# Altium PCB Microcontroller PCB 404.PcbDoc
Units mil, origin at the board's own origin, x right, y up, seen from the top; angles counter-clockwise.
Board outline 1740 x 1785 mil, 2 copper layers (Top Layer, Bottom Layer); 22 components, 26 nets, 103 pads, 1 vias.
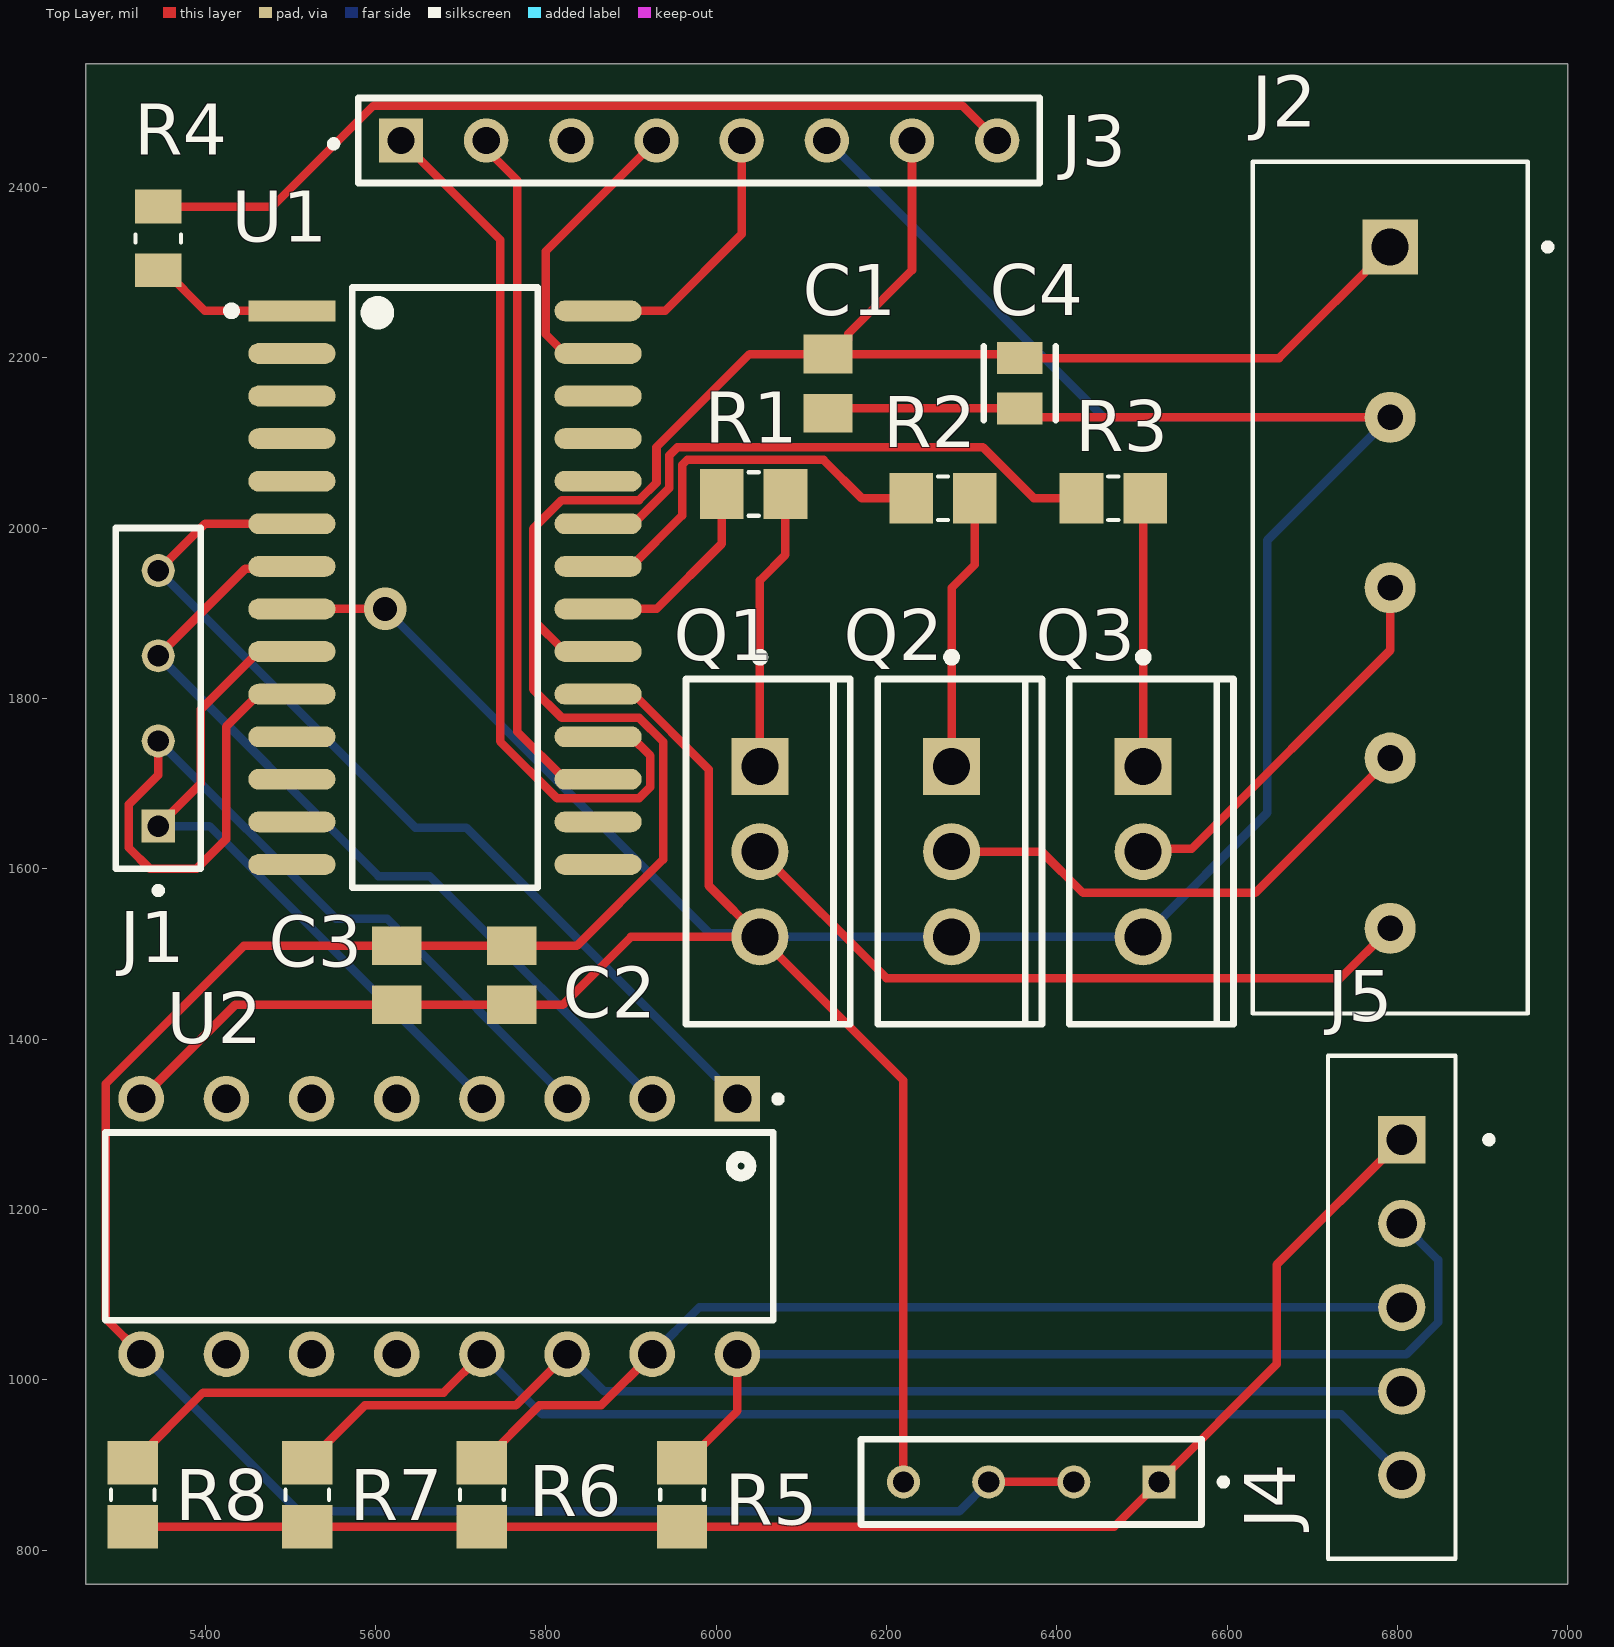
[diagram p0: Top Layer view]
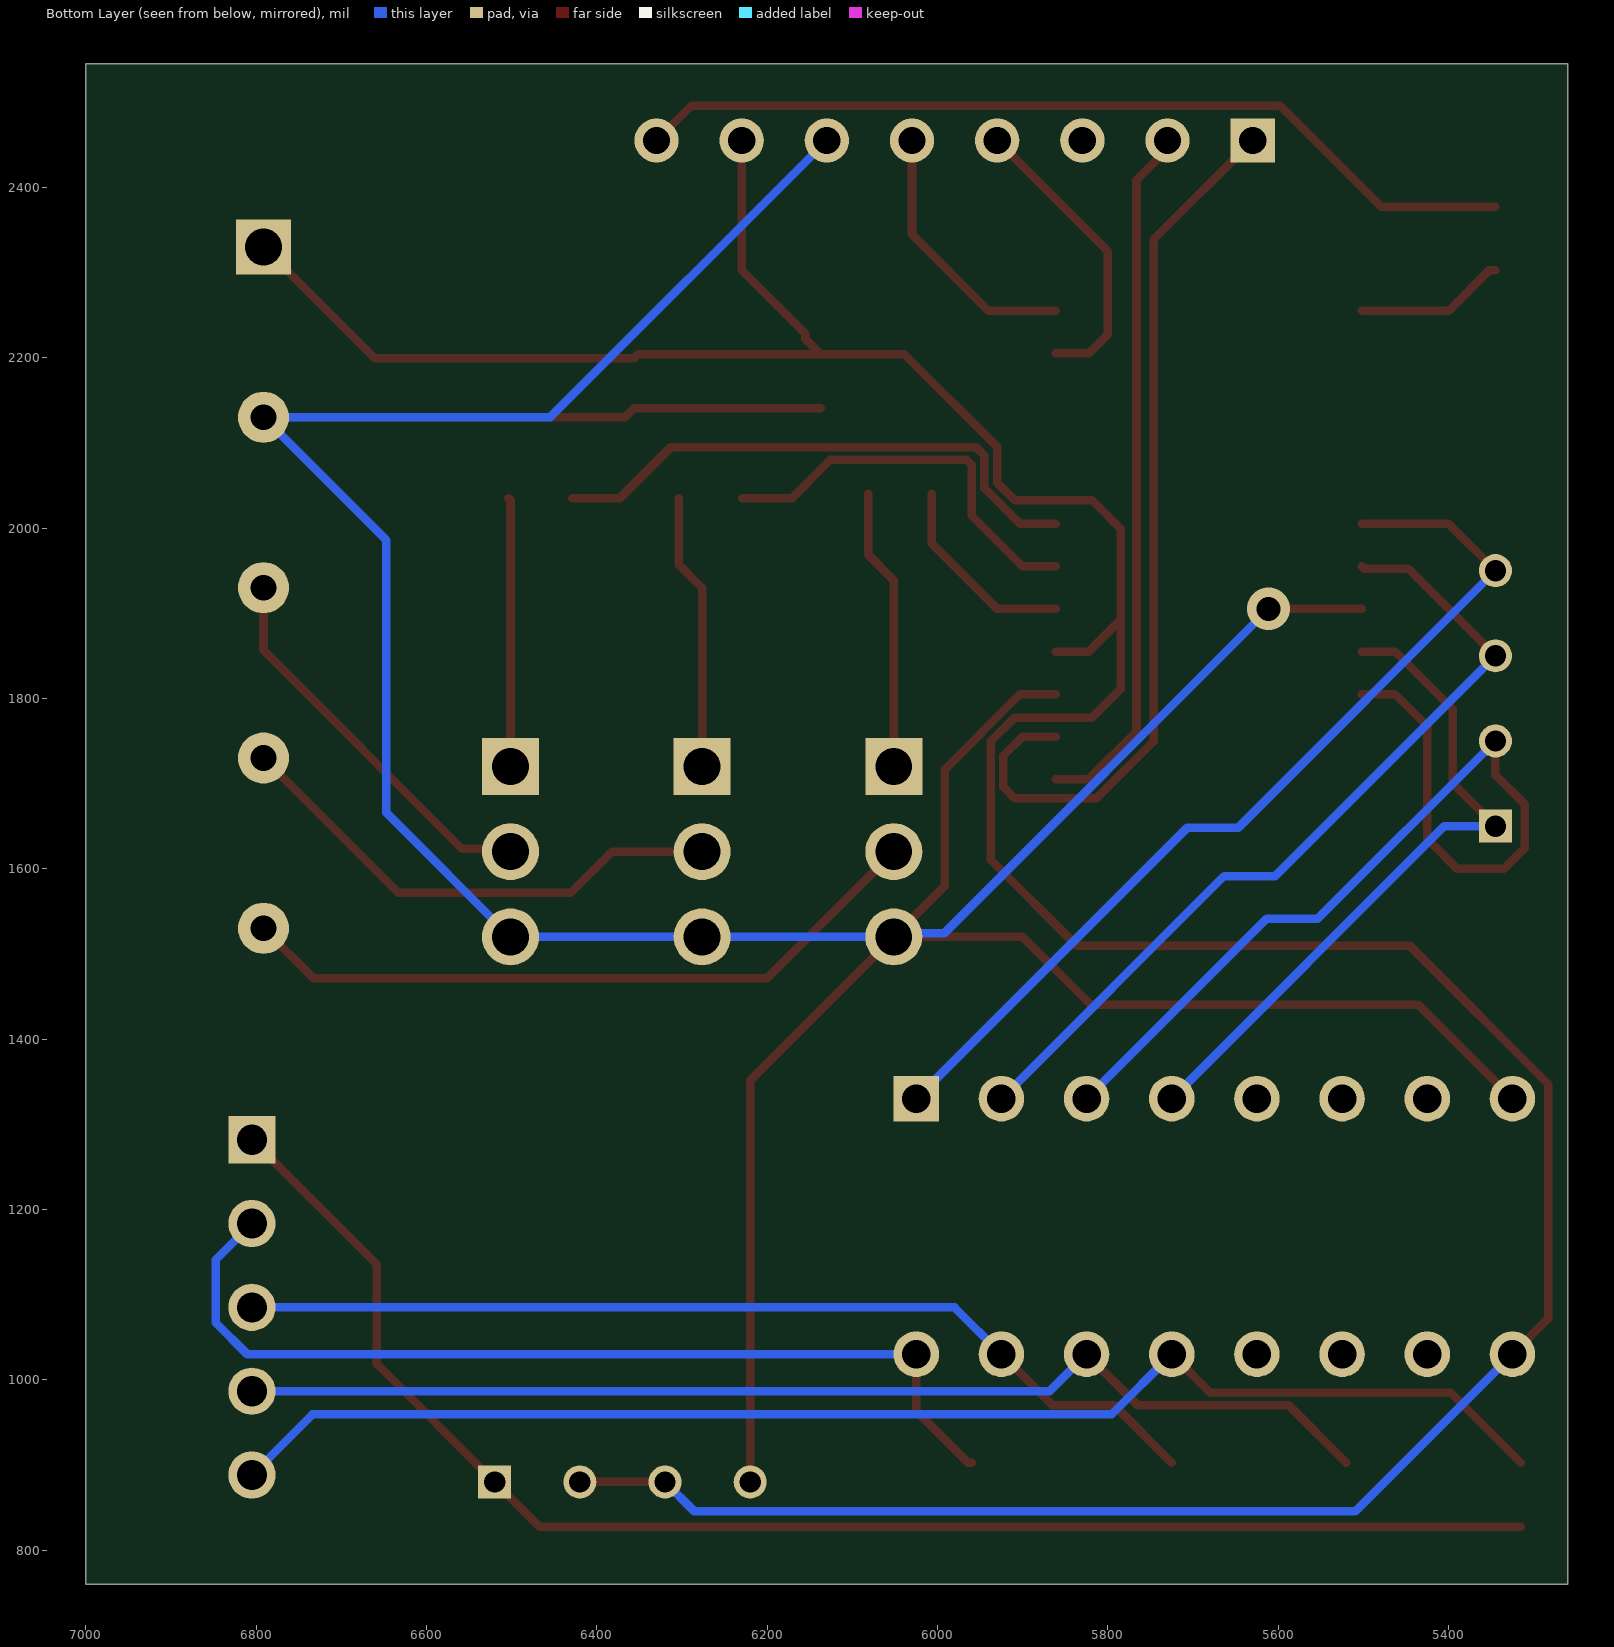
[diagram p1: Bottom Layer view, seen from below]

## Layer stack, top to bottom
Top Solder: solder mask 0.4, Solder Resist, Dk 3.5
Top Layer: signal copper 1.4
Dielectric 1: dielectric 12.6, FR-4, Dk 4.8
Bottom Layer: signal copper 1.4
Bottom Solder: solder mask 0.4, Solder Resist, Dk 3.5

## Board outline
5260,2545 7000,2545 7000,760 5260,760

## Design rules (kind name [scope] priority, off if disabled: settings)
Clearance [All] p1: gap=10 ignorepadtopadclearanceinfootprint=FALSE except(0: Arc-Hole Track-Hole SMDPad-Hole THPad-Hole Via-Hole Fill-Hole Poly-Hole Region-Hole Text-Hole; 5: Arc-Arc Arc-Track Arc-SMDPad Track-Track Track-SMDPad SMDPad-SMDPad)
PolygonConnect [All] p1: connectstyle=Relief reliefconductorwidth=10 reliefentries=4 polygonreliefangle="90 Angle" airgapwidth=10
RoutingVias [All] p1: holewidth=28 width=50 viastyle="Through Hole" minholewidth=28 minwidth=50 maxholewidth=28 maxwidth=50
SolderMaskExpansion [All] p1: expansion=4 istentingtop=FALSE
Width [All] p1: maxlimit=50 minlimit=10 preferedwidth=10 bottomlayer_maxwidth=10 minimp=50.000000 maximp=50.000000 favimp=50.000000
30 further rules are at their usual default settings.

## Components (designator, comment, footprint, x,y, rotation, side; value= is the part's Value field where it differs from the comment)
C1 "C0805C104K4RACTU" CAPC2012X100N 6131.42,2169.65 r270 top value="0.10 μF"
C2 "C0805C104K4RACTU" CAPC2012X100N 5760,1475 r270 top
C3 "C2012X7S0J106M085AC" CAPC2012X100N 5625,1475 r270 top
C4 "GRM21BR60J107ME15K" FP-C0805C-DN-MFG 6356.42,2170 r270 top
J1 "TS-104-T-A" SAMTEC_TS-104-T-A 5345,1800 r90 top
J2 "Comment" PCBComponent_1 6791.42,2330 r270 top
J3 "TS-108-X-A-1" SAMTEC_TS-108-X-A-1 5980,2455 r0 top
J4 "TS-104-T-A" SAMTEC_TS-104-T-A 6370,880 r180 top
J5 "Comment" TE_440052-5 6805,1085 r270 top
Q1 "TIP121" ONSC-TO-220-3-221A-09 6051.42,1620 r0 top
Q2 "TIP121" ONSC-TO-220-3-221A-09 6276.42,1620 r0 top
Q3 "TIP121" ONSC-TO-220-3-221A-09 6501.42,1620 r0 top
R1 "RC0805FR-07205RL" RESC2012X60 6044.02,2040 r0 top
R2 "RC0805FR-07205RL" RESC2012X60 6266.42,2035 r0 top
R3 "RC0805FR-07205RL" RESC2012X60 6466.42,2035 r0 top
R4 "RMCF0805JT10K0" RESC2012X65N 5345,2340 r90 top
R5 "Comment" RCC08054K70FKEA 5960,865 r270 top
R6 "Comment" RCC08054K70FKEA 5725,865 r270 top
R7 "Comment" RCC08054K70FKEA 5520,865 r270 top
R8 "Comment" RCC08054K70FKEA 5315,865 r270 top
U1 "PIC18F24Q10-I/SO" FP-C04-052-IPC_A 5681.67,1930 r0 top
U2 "ULN2003A" DIP762W51P254L1992H425Q16 5675,1180 r270 top

## Footprints (in the part's own frame and the unit in brackets; to place one, negate y for a bottom-side part, rotate by r counter-clockwise, add the part's x,y. Pads: shape width x height; smd on the part's side, far side on the other; paste and mask are expansions set on the pad)
CAPC2012X100N [mm]
  rect 1.15x1.47 smd: 1(-0.88,0) 2(0.88,0)
DIP762W51P254L1992H425Q16 [mm] "16 DIP package"
  rect 1.358x1.358 hole 0.85: 1(-3.81,8.89)
  round 1.358 hole 0.85: 2(-3.81,6.35) 3(-3.81,3.81) 4(-3.81,1.27) 5(-3.81,-1.27) 6(-3.81,-3.81) 7(-3.81,-6.35) 8(-3.81,-8.89) 9(3.81,-8.89) 10(3.81,-6.35) 11(3.81,-3.81) 12(3.81,-1.27) 13(3.81,1.27) 14(3.81,3.81) 15(3.81,6.35) 16(3.81,8.89)
  silkscreen extent -3.9,-9.96 2.8,10.2
FP-C04-052-IPC_A [mil]
  rect 102.47x24.49 smd paste+0 mask+0: 1(-179.74,325)
  rrect100% 102.47x24.49 smd paste+0 mask+0: 2(-179.74,275) 3(-179.74,225) 4(-179.74,175) 5(-179.74,125) 6(-179.74,75) 7(-179.74,25) 8(-179.74,-25) 9(-179.74,-75) 10(-179.74,-125) 11(-179.74,-175) 12(-179.74,-225) 13(-179.74,-275) 14(-179.74,-325) 15(179.74,-325) 16(179.74,-275) 17(179.74,-225) 18(179.74,-175) 19(179.74,-125) 20(179.74,-75) 21(179.74,-25) 22(179.74,25) 23(179.74,75) 24(179.74,125) 25(179.74,175) 26(179.74,225) 27(179.74,275) 28(179.74,325)
  silkscreen extent -256,-352 109,352
FP-C0805C-DN-MFG [mm]
  rect 0.95x1.35 smd paste+0 mask+0: 1(-0.75,0) 2(0.75,0)
  silkscreen extent -1.1,-1.07 1.1,1.07, body extent -1.4,-0.85 1.4,0.85, height 0.25
ONSC-TO-220-3-221A-09 [mm] "FM, 3-Leads, Body 10.3x4.85mm, Pitch 2.54mm"
  rect 1.7x1.7 hole 1.1: 1(0,2.54)
  round 1.7 hole 1.1: 2(0,0) 3(0,-2.54)
  silkscreen extent -2.2,-5.15 2.7,5.92, body extent -2.18,-5.15 2.67,5.15, height 19.85
PCBComponent_1 [mil]
  rect 64.96x64.96 hole 43.31: 1(0,0)
  round 60 hole 30: 2(200,0) 3(400,0) 4(600,0) 5(800,0)
  silkscreen extent -100,-161 900,189
RCC08054K70FKEA [mm] "4.7k Ohm Resistor"
  rect 1.3x1.5 smd: 1(-0.95,0) 2(0.95,0)
  silkscreen extent -0.15,-0.65 0.15,0.65
RESC2012X60 [mm]
  rect 1.3x1.5 smd: 1(-0.95,0) 2(0.95,0)
  silkscreen extent -0.15,-0.65 0.15,0.65
RESC2012X65N [mm]
  rect 1.01x1.38 smd: 1(-0.95,0) 2(0.95,0)
  silkscreen extent -0.12,-0.68 0.12,0.68
SAMTEC_TS-104-T-A [mm]
  rect 0.985x0.985 hole 0.635: 01(-3.81,0)
  round 0.985 hole 0.635: 02(-1.27,0) 03(1.27,0) 04(3.81,0)
  silkscreen extent -5.83,-1.27 5.08,1.27
SAMTEC_TS-108-X-A-1 [mil]
  rect 52x52 hole 32: 01(-350,0)
  round 52 hole 32: 02(-250,0) 03(-150,0) 04(-50,0) 05(50,0) 06(150,0) 07(250,0) 08(350,0)
  silkscreen extent -433,-50 400,50
TE_440052-5 [mm]
  rect 1.408x1.408 hole 0.9: 1(-5,0)
  round 1.408 hole 0.9: 2(-2.5,0) 3(0,0) 4(2.5,0) 5(5,0)
  silkscreen extent -7.5,-2.2 7.5,2.7

## Part data
C1: library part CMP-2007-00274-2, "CAP CER 0.1UF 16V X7R 0805", Capacitance="0.10 μF", Manufacturer=KEMET, Package=C0805C-DN, Temperature="-55°C to +125°C", Temperature Characteristic=X7R, Temperature Coefficient=30ppm/°C, Temperature Range High=+125°C, Temperature Range Low=-55°C, Tolerance=0.1, Voltage Rating="16 V", Automotive=No, Category=Cap, ComponentLink2Description=Datasheet, ComponentLink2URL=https://content.kemet.com/datasheets/KEM_C1003_C0G_SMD.pdf, Device Class L1="Passive Components", Device Class L2=Capacitors, Device Class L3="Ceramic Capacitors", Digikey Description="CAP CER 0.1UF 16V X7R 0805", Height=0.88mm, Ipc Land Pattern Name=CAPC200125X78, Lead Free=Yes, Manufacturer Part Number=C0805C104K4RACTU, Material=Ceramic, Mouser Description="Multilayer Ceramic Capacitors MLCC - SMD/SMT 16volts 0.1uF X7R 10%", Octopart=https://octopart.com/c0805c104k4ractu-kemet-92155, RoHS=TRUE
C2: library part 08051C103KAT2A, "10000pF Â±10% 100V Ceramic Capacitor X7R 0805 (2012 Metric)", Package="2012 AVX", Availability=Good, Check_prices=https://www.snapeda.com/parts/08051C103KAT2A/AVX/view-part/437183/?ref=eda, MF=AVX, MP=08051C103KAT2A, Price=None, Purchase-URL=https://pricing.snapeda.com/search/part/08051C103KAT2A/?ref=eda, SnapEDA_Link=https://www.snapeda.com/parts/08051C103KAT2A/AVX/view-part/437183/?ref=snap
C3: "Cap Ceramic 10uF 6.3V X7S 20% SMD 0805 125Â°C Punched Paper T/R", Package=None, Availability=Unavailable, MF="{'manufacturer': u'TDK Corporation'}", MP=C2012X7S0J106M085AC, Price=None
C4: "0805 100 uF 6.3 V Â±20% Tolerance X7S Multilayer Ceramic Chip Capacitor", Package="2012 Murata", Availability="In Stock", Check_prices=https://www.snapeda.com/parts/GRM21BR60J107ME15K/Murata%20Electronics%20North%20America/view-part/1845859/?ref=eda, MF="Murata Electronics", MP=GRM21BR60J107ME15K, Price=None, SnapEDA_Link=https://www.snapeda.com/parts/GRM21BR60J107ME15K/Murata%20Electronics%20North%20America/view-part/1845859/?ref=snap
J1 J4: "TS - Samtec 2.54mm Single Row Machined Terminal Strip - Fast Stock", Package=None, Availability="In Stock", Check_prices=https://www.snapeda.com/parts/TS-104-T-A/Samtec+Inc./view-part/?ref=eda, MF="Samtec Inc.", MP=TS-104-T-A, Price=None, Purchase-URL=https://pricing.snapeda.com/search/part/TS-104-T-A/?ref=eda, SnapEDA_Link=https://www.snapeda.com/parts/TS-104-T-A/Samtec+Inc./view-part/?ref=snap
J2: library part 282837-5, "5 position terminal block"
J3: "TS Series .100 Single Row Screw Machine Terminal Strip", Package=None, Availability=Bad, Check_prices=https://www.snapeda.com/parts/TS-108-G-A-1/Samtec/view-part/4699387/?ref=eda, MF=Samtec, MP=TS-108-G-A-1, Price=None, SnapEDA_Link=https://www.snapeda.com/parts/TS-108-G-A-1/Samtec/view-part/4699387/?ref=snap
J5: library part 440052-5, "Connector Header Through Hole 5 position 0.098 _2.50mm_", Package=None, Digi-Key_Part_Number=A145094-ND, Digi-Key_Purchase_URL=https://www.digikey.com/product-detail/en/te-connectivity-amp-connectors/440052-5/A145094-ND/2188064?utm_source=snapeda&utm_medium=aggregator&utm_campaign=symbol, EU_RoHS_Compliance=Compliant, MF="TE Connectivity", MP=440052-5, SnapEDA_Link=https://www.snapeda.com/parts/440052-5/TE%20Connectivity%20AMP%20Connectors/view-part/2409970/?ref=snap, TE_purchase_URL=https://www.te.com/usa-en/product-440052-5.html?te_bu=Cor&te_type=disp&te_campaign=seda_glo_cor-seda-global-disp-prtnr-fy19-seda-model-bom-cta_sma-317_1&elqCampaignId=32493
Q1 Q2 Q3: library part CMP-1047-00128-1, "Plastic Medium-Power, Complementary Silicon Transistor, 3-Pin TO-220, Tube", Manufacturer="On Semiconductor", ComponentLink1Description="Manufacturer URL", ComponentLink1URL=http://www.onsemi.com/, ComponentLink2Description=Datasheet, ComponentLink2URL=http://www.onsemi.cn/pub_link/Collateral/TIP120-D.PDF, ComponentLink3Description="Package Specification", ComponentLink3URL=http://www.onsemi.com/pub_link/Collateral/221A-09.PDF, DatasheetVersion="Rev. 8", IC Continuous (A)=5, Mounting Technology="Through Hole", PackageDescription="3-Pin Flange Mount, Vertical Straight Lead, Body 9.97 x 4.445 mm, Pitch 2.54 mm", PackageReference=TO-220-3-221A-09, PackageVersion="Rev. AG, 09/2011", Packing=Tube, PartNumber=TIP121, Polarity=NPN, RoHS=FALSE
R1 R2 R3: "RC Series 0805 0.125 W 2 kOhms 5% Â±100 ppm/Â°C SMT Thick Film Chip Resistor", Package=None, Availability=Unavailable, MF="{'manufacturer': u'YAGEO'}", MP=RC0805FR-07205RL, Price=None
R4: "10 kOhms Â±5% 0.125W, 1/8W Chip Resistor 0805 (2012 Metric) Automotive AEC-Q200 Thick Film", Package="2012 Stackpole", Availability=Warning, BuyPart=https://www.snapeda.com/parts/RMCF0805JT10K0/Stackpole%20Electronics%20Inc/view-part/3958697/?ref=eda, DigiKey-Purchase-URL=https://snapeda.com/shop?store=DigiKey&id=3958697, MF="Stackpole Electronics Inc", MP=RMCF0805JT10K0, Price=None, SnapEDA_Link=https://www.snapeda.com/parts/RMCF0805JT10K0/Stackpole%20Electronics%20Inc/view-part/3958697/?ref=snap
R5 R6 R7 R8: library part RCC08054K70FKEA, "4.7k ohm resistor"
U1: library part CMP-06276-000706-1, "IC MCU 8BIT 16KB FLASH 28SOIC", Case/Package=SOIC, Frequency=64MHz, Max Operating Temperature=85°C, Min Operating Temperature=-40°C, Core Architecture=PIC, Interface=I2C, Memory Size=16KB, Memory Type=FLASH, Number of I/Os=25, Oscillator Type=Internal, Packaging=Rail/Tube, Peripherals="Brown-out Detect/Reset", Series="PIC® XLP™ 18Q"
U2: library part TCED4100, "Optocoupler, Photodarlington Output, Dual Channel, High Gain", Package=None, Availability=Unavailable, MP=TCED4100, Price=None

## Via types
v1: diameter 50, hole 28, Top Layer to Bottom Layer, 1 vias

## Nets (pads, with @x,y where several pads share a name; then routed paths per layer and width w, separated by ;. In a path a pad name is that pad's centre, name@x,y a point inside that pad or via, vN(x,y) a via of type N, cw(c..) or ccw(c..) an arc to the next point about the centre after c; other vN are vias at no path point)
GND: C1.2 C2.2 C3.2 C4.2 J2.2 J3.06 J4.04 Q1.3 Q2.3 Q3.3 U1.8 U1.19 U2.8 | length 5247.3
  Top Layer w10: U2.8 5435.35,1440.35 C3.2 C2.2 5760.35,1440 5820,1440 5900,1520 Q1.3 ; U1.8 v1(5611.42,1905) ; U1.19 5903.08,1805 5991.42,1716.66 5991.42,1580 Q1.3 ; C1.2@6136.89,2140.47 C4.2 6366.89,2130 J2.2 ; J4.04 6220,1351.42 Q1.3
  Bottom Layer w10: v1(5611.42,1905) 5992.13,1524.29 6047.13,1524.29 Q1.3 Q2.3 Q3.3 6647.08,1665.66 6647.08,1985.66 J2.2 6455,2130 J3.06
NetC1_1: C1.1 C2.1 C3.1 C4.1 J2.1 J3.07 J4.02 J4.03 U1.20 U2.9 | length 4340.9
  Top Layer w10: U2.9 5283.27,1071.73 5283.27,1347.29 5445.63,1509.65 C3.1 C2.1 5836.51,1509.65 5937.65,1610.79 5937.65,1749.21 5909.62,1777.25 5818.72,1777.25 5785.18,1810.79 5785.18,1892.25 ; U1.20 5822.43,1855 5785.18,1892.25 ; J3.07 6230,2302.87 6155.35,2228.23 6155.35,2221.93 C1.1@6137.72,2204.29 ; J4.03 J4.02 ; J2.1 6660.94,2199.53 C4.1 6351.65,2204.29 C1.1@6137.72,2204.29 ; 5785.18,1892.25 5785.18,1999.21 5818.72,2032.75 5909.62,2032.75 5930,2053.13 5930,2095 6039.29,2204.29 C1.1 C1.1@6137.72,2204.29
  Bottom Layer w10: U2.9 5509.39,845.61 6285.61,845.61 J4.03
NetJ1_01: J1.01 U1.9 U2.4 | length 805.4
  Top Layer w10: J1.01 5395,1700 5395,1787.06 5462.94,1855 U1.9
  Bottom Layer w10: J1.01 5405,1650 U2.4
NetJ1_02: J1.02 U1.10 U2.3 | length 1157.5
  Top Layer w10: J1.02 5345,1709.99 5310.61,1675.6 5310.61,1624.4 5335.01,1600 5390,1600 5424.78,1634.78 5424.78,1766.84 5462.94,1805 U1.10
  Bottom Layer w10: J1.02 5553.6,1541.4 5613.6,1541.4 U2.3
NetJ1_03: J1.03 U1.7 U2.2 | length 995.8
  Top Layer w10: J1.03 5447.23,1952.23 5499.16,1952.23 U1.7
  Bottom Layer w10: J1.03 5603.6,1591.4 5663.6,1591.4 U2.2
NetJ1_04: J1.04 U1.6 U2.1 | length 1116.5
  Top Layer w10: J1.04 5400,2005 U1.6
  Bottom Layer w10: J1.04 5646.89,1648.11 5706.89,1648.11 U2.1
NetJ2_3: J2.3 Q3.2 | length 461.5
  Top Layer w10: Q3.2@6504.66,1623.24 6558.24,1623.24 6791.42,1856.42 J2.3
  Top Layer w50: Q3.2 Q3.2@6504.66,1623.24
NetJ2_4: J2.4 Q2.2 | length 600.7
  Top Layer w10: Q2.2 6382.42,1620 6430.89,1571.54 6632.95,1571.54 J2.4
NetJ2_5: J2.5 Q1.2 | length 825.7
  Top Layer w10: Q1.2 6199.88,1471.54 6732.95,1471.54 J2.5
NetJ3_01: J3.01 U1.18 | length 1070.4
  Top Layer w10: J3.01 5746.42,2338.58 5746.42,1749.55 5813.21,1682.75 5909.62,1682.75 5922.65,1695.79 5922.65,1732.75 5900.41,1755 U1.18
NetJ3_02: J3.02 U1.17 | length 827.3
  Top Layer w10: J3.02 5730,2445 5766.42,2408.58 5766.42,1761.01 5822.43,1705 U1.17
NetJ3_04: J3.04 U1.27 | length 352
  Top Layer w10: U1.27 5822.43,2205 5800.18,2227.25 5800.18,2325.18 J3.04
NetJ3_05: J3.05 U1.28 | length 315.9
  Top Layer w10: U1.28 5940,2255 6030,2345 J3.05
NetJ3_08: J3.08 R4.2 | length 1051.1
  Top Layer w10: R4.2 5479.19,2377.4 5597.79,2496 6289,2496 J3.08
NetJ4_01: J4.01 J5.1 R5.2 R6.2 R7.2 R8.2 | length 1746.6
  Top Layer w10: R8.2 R7.2 R6.2 R5.2 6467.6,827.6 J4.01 6658.34,1018.34 6658.34,1135.19 J5.1
NetJ5_2: J5.2 R5.1 U2.16 | length 1128.8
  Top Layer w10: R5.1 5963.94,902.4 6025,963.46 U2.16
  Bottom Layer w10: U2.16 6810.41,1030 6847.72,1067.31 6847.72,1140.71 J5.2
NetJ5_3: J5.3 R6.1 U2.15 | length 1155.6
  Top Layer w10: R6.1 5792.6,970 5865,970 U2.15
  Bottom Layer w10: U2.15 5980,1085 J5.3
NetJ5_4: J5.4 R7.1 U2.14 | length 1355.8
  Top Layer w10: R7.1 5587.6,970 5765,970 U2.14
  Bottom Layer w10: U2.14 5868.43,986.57 J5.4
NetJ5_5: J5.5 R8.1 U2.13 | length 1601.6
  Top Layer w10: R8.1 5397.6,985 5680,985 U2.13
  Bottom Layer w10: U2.13 5795.74,959.26 6733.89,959.26 J5.5
NetQ1_1: Q1.1 R1.2 | length 332.4
  Top Layer w10: Q1.1 6051.42,1938.58 6081.42,1968.58 R1.2
NetQ2_1: Q2.1 R2.2 | length 326.4
  Top Layer w10: Q2.1 6276.42,1929.62 6303.82,1957.02 R2.2
NetQ3_1: Q3.1 R3.2 | length 316
  Top Layer w10: Q3.1 6501.42,2032.6 R3.2
NetR1_1: R1.1 U1.21 | length 235.3
  Top Layer w10: U1.21 5930,1905 6006.61,1981.61 R1.1
NetR2_1: R2.1 U1.22 | length 472.7
  Top Layer w10: U1.22 5900.41,1955 5960,2014.59 5960,2074.03 5965.86,2079.88 6126.15,2079.88 6171.03,2035 R2.1
NetR3_1: R3.1 U1.23 | length 652.1
  Top Layer w10: U1.23 5903.08,2005 5945,2046.92 5945,2085.24 5954.64,2094.88 6313.2,2094.88 6373.08,2035 R3.1
NetR4_1: R4.1 U1.1 | length 176.6
  Top Layer w10: R4.1 5352.28,2302.6 5399.88,2255 U1.1
pads on no net: J3.03 U1.2 U1.3 U1.4 U1.5 U1.11 U1.12 U1.13 U1.14 U1.15 U1.16 U1.24 U1.25 U1.26 U2.5 U2.6 U2.7 U2.10 U2.11 U2.12